# EAGLE board TSAR_Actuator_Controller (EAGLE 9.5.2)
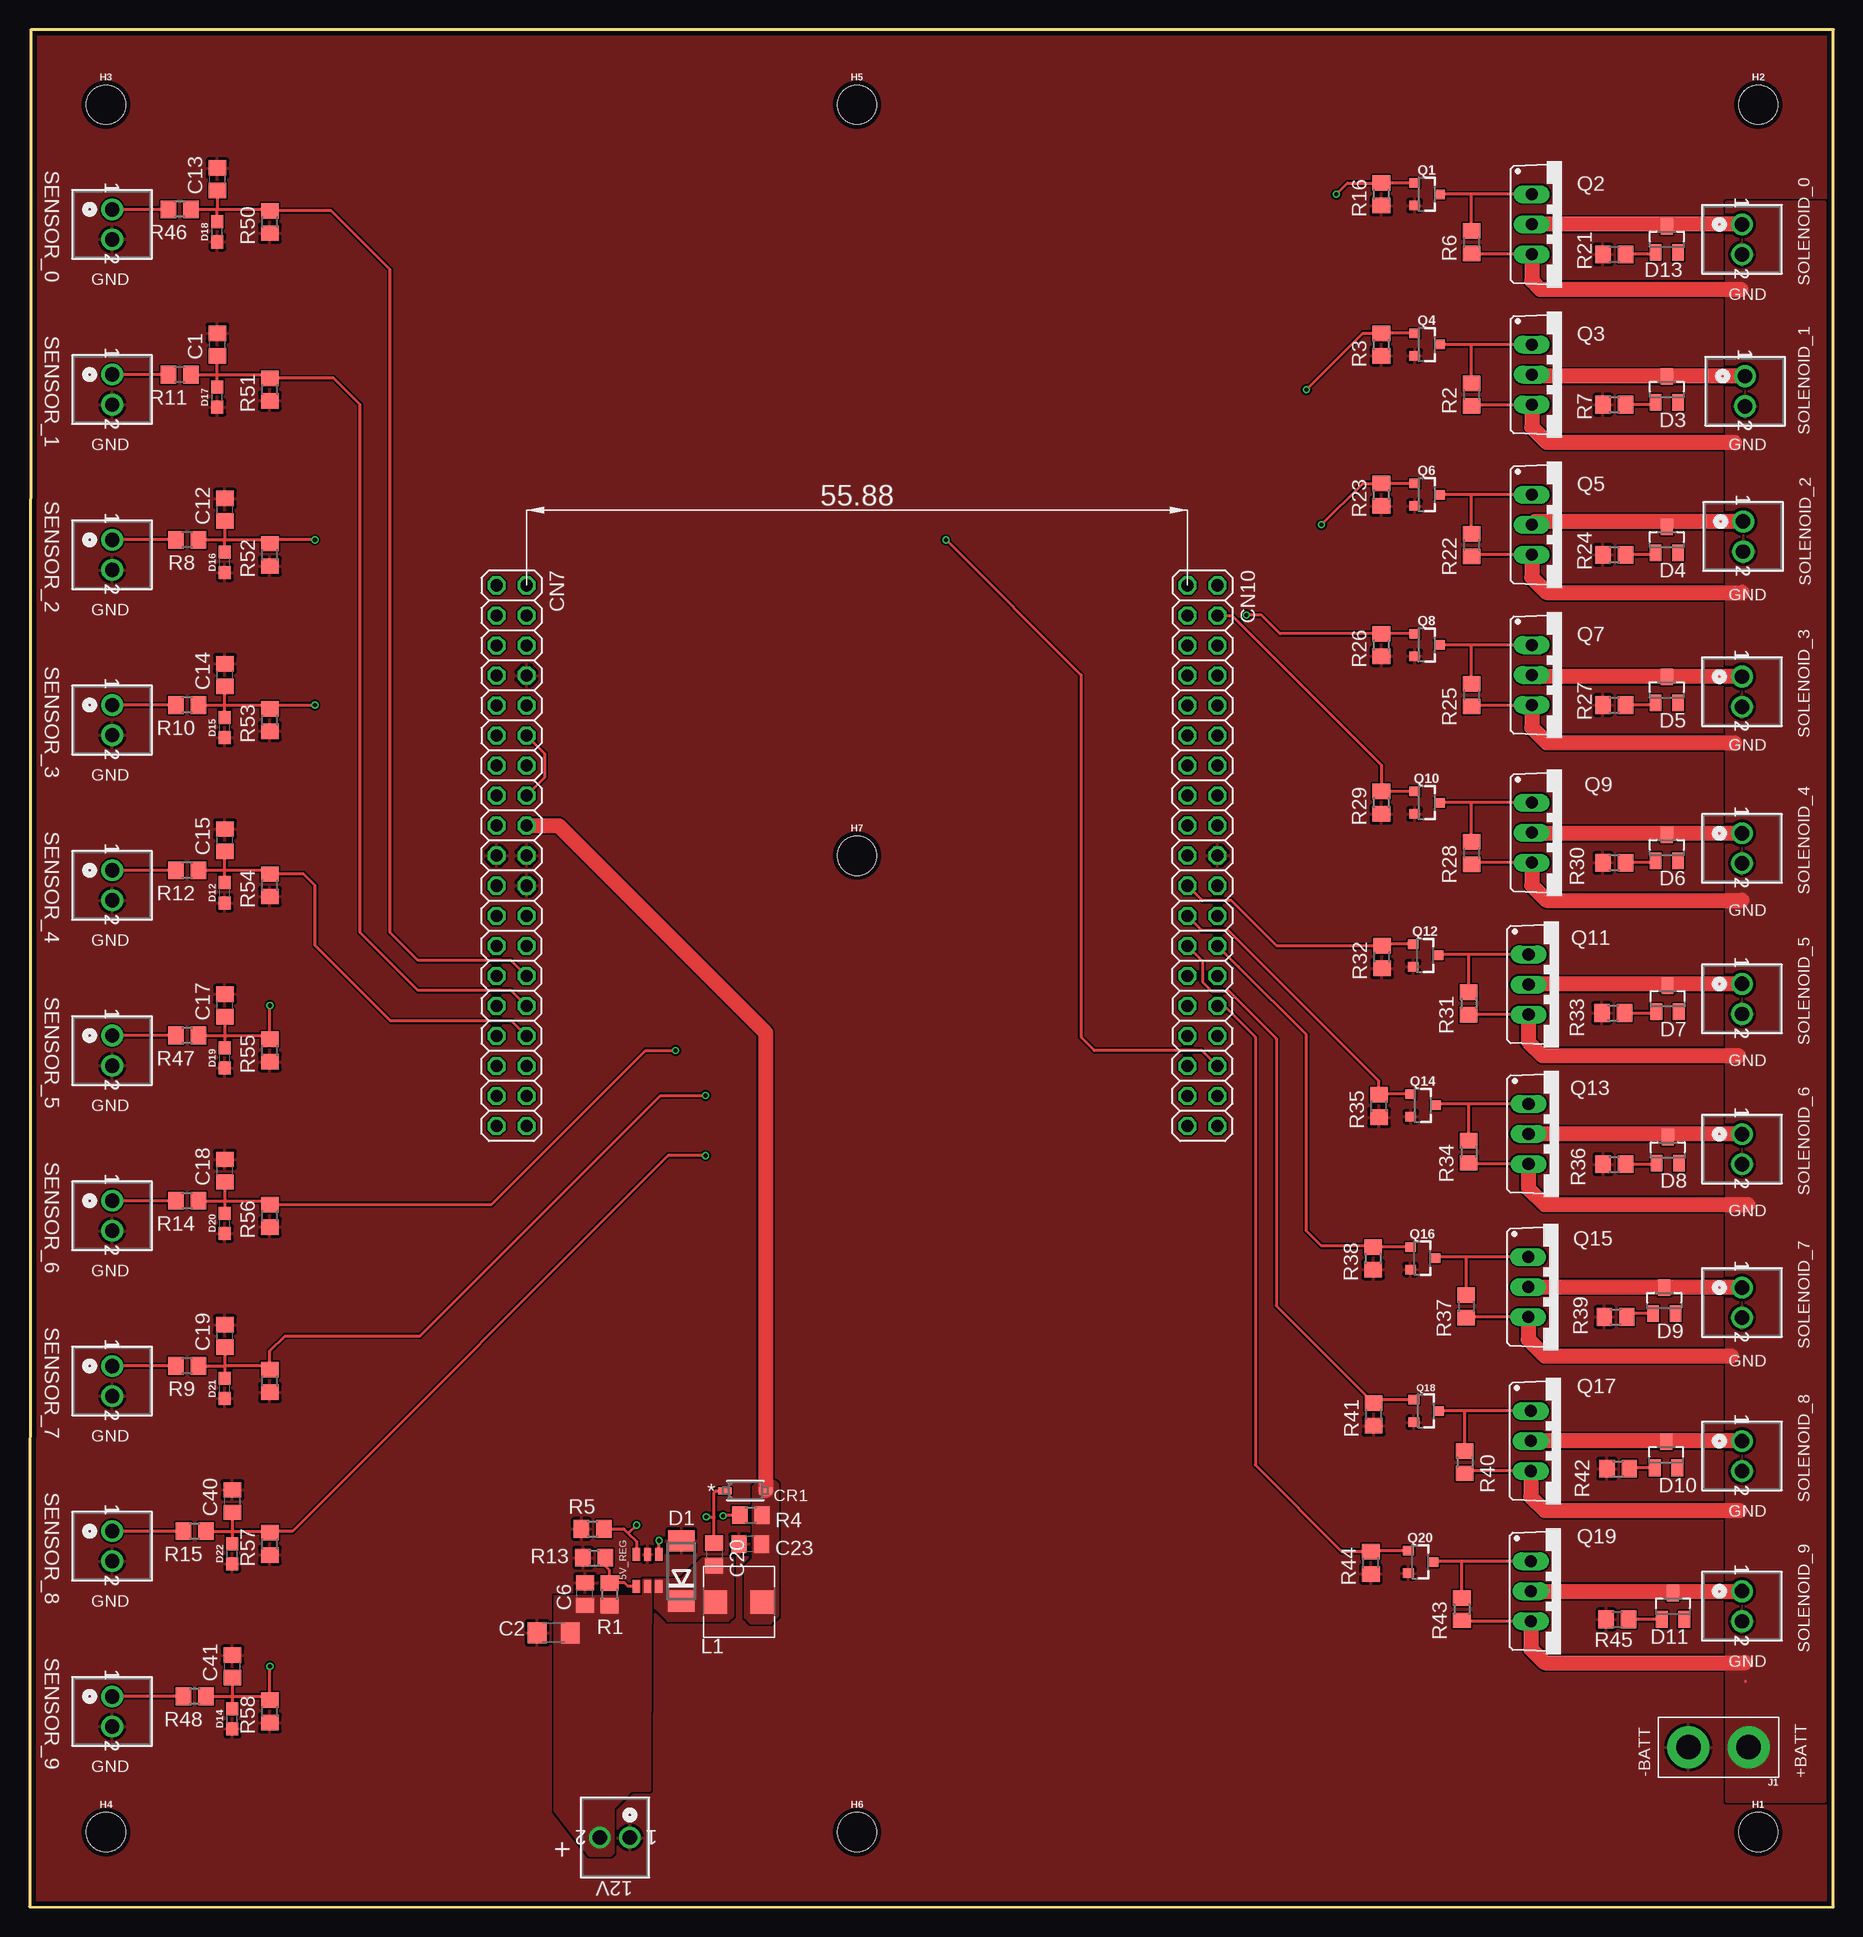
[diagram p0: board, top side]
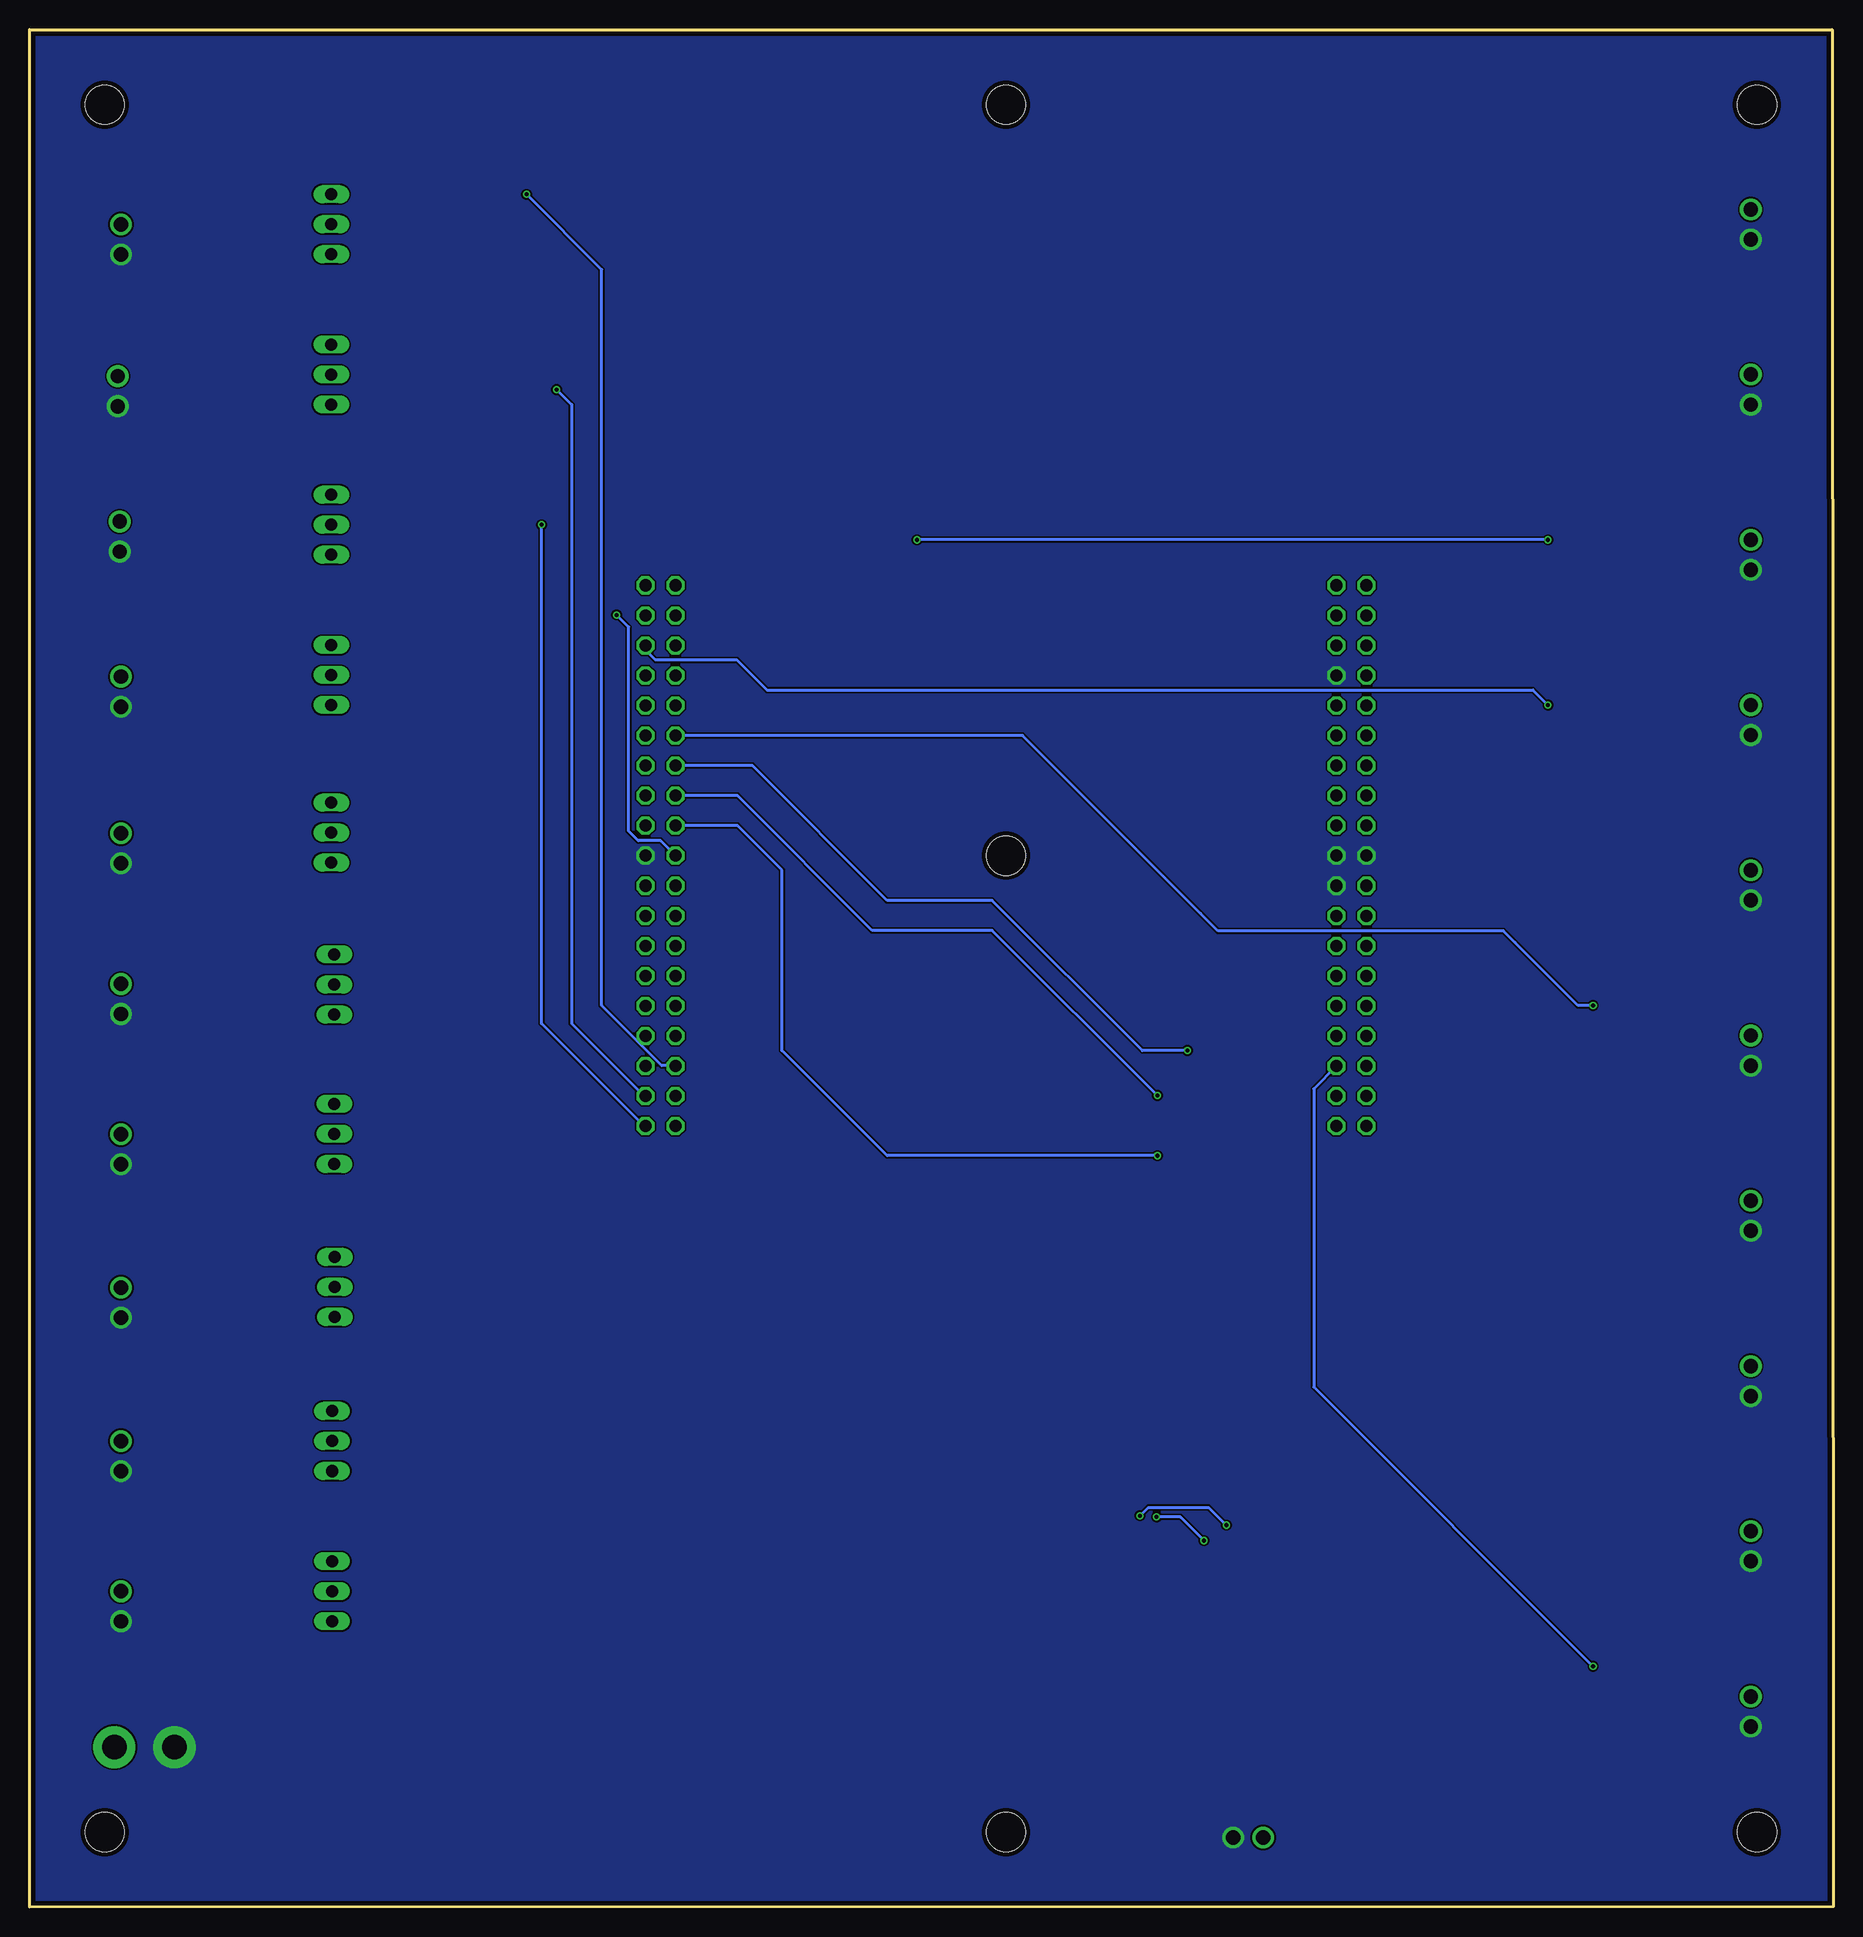
[diagram p1: board, bottom side, seen from below]

Size 152.51 x 158.75 mm. Coordinates in mm from the lower left corner, seen from the top.
Outline: 0,0.04 152.51,0 152.51,158.75 0.11,158.75 0,0.04
Copper layers (1*16): Top 0.035559375mm / dielectric 1.6mm / Bottom 0.035559375mm
Design rules "oshpark-2layer *": minimum track width 6mil, minimum drill 10mil, track to track 6mil, track to pad 6mil, pad to pad 6mil, via to via 6mil, smd to smd 6mil, copper to edge 15mil, drill to drill 6mil, minimum pad ring 5mil, minimum via ring 5mil, stop-mask expansion 2.5mil, vias tented up to drill 10mil, thermal gap 10mil

## Footprints (pad centres in the part's own frame; a part is rotated, then mirrored left to right if it is on the bottom)
SOT6 = smd 1.092 x 0.61: P$1 -1.346,0.95; P$2 -1.346,0; P$3 -1.346,-0.95; P$4 1.346,-0.95; P$5 1.346,0; P$6 1.346,0.95
CONN_282834-2 = drill 1.219 pad 1.727: 1 -2.54,0; 2 0,0
C0805 = smd 1.3 x 1.5: 1 -0.95,0; 2 0.95,0
C1206 = smd 1.6 x 1.8: 1 -1.4,0; 2 1.4,0
2X19 = drill 1.016 octagon: 1 -22.86,-1.27; 2 -22.86,1.27; 3 -20.32,-1.27; 4 -20.32,1.27; 5 -17.78,-1.27; 6 -17.78,1.27; 7 -15.24,-1.27; 8 -15.24,1.27; 9 -12.7,-1.27; 10 -12.7,1.27; 11 -10.16,-1.27; 12 -10.16,1.27; 13 -7.62,-1.27; 14 -7.62,1.27; 15 -5.08,-1.27; 16 -5.08,1.27; 17 -2.54,-1.27; 18 -2.54,1.27; 19 0,-1.27; 20 0,1.27; 21 2.54,-1.27; 22 2.54,1.27; 23 5.08,-1.27; 24 5.08,1.27; 25 7.62,-1.27; 26 7.62,1.27; 27 10.16,-1.27; 28 10.16,1.27; 29 12.7,-1.27; 30 12.7,1.27; 31 15.24,-1.27; 32 15.24,1.27; 33 17.78,-1.27; 34 17.78,1.27; 35 20.32,-1.27; 36 20.32,1.27; 37 22.86,-1.27; 38 22.86,1.27
SOD123 = smd 1.111 x 0.601: 1 -1.725,0; 2 1.725,0
DO214AA = smd 1.8 x 2.2: A 2.55,0; C -2.55,0
SOT23 = smd 1 x 1.4: 1 -0.95,-1.1; 2 0.95,-1.1; 3 0,1.1
0603 = smd 1.1 x 1: 1 -0.85,0; 2 0.85,0
STAND-OFF = hole 3.302: 0,0
1X02_XTRA_BIG = drill 2.057 pad 3.556: 1 -2.54,0; 2 2.54,0
0.209"LX0.197"W(5.30MMX5.00MM) = smd 2 x 2: 1 -2,0; 2 2,0
SOT23-3 = smd 0.8 x 0.9: 1 -0.95,-1; 2 0.95,-1; 3 0,1.1
TO220BV = drill 1.016 long: D 0,-2.54; G -2.54,-2.54; S 2.54,-2.54
R0805 = smd 1.3 x 1.5: 1 -0.95,0; 2 0.95,0

## Placement (x,y rotation side)
5V_REG  MP2456GJ-P  [SOT6]  52.26,28.48 270 top
12V  282834-2  [CONN_282834-2]  48.21,5.89 180 top
C1  120pF  [C0805]  15.88,132.12 90 top
C2  4.7uF  [C1206]  44.32,23.2 180 top
C6  0.1uF  [C0805]  46.96,26.48 90 top
C12  120pF  [C0805]  16.51,118.15 90 top
C13  120pF  [C0805]  15.88,146.09 90 top
C14  120pF  [C0805]  16.51,104.18 90 top
C15  120pF  [C0805]  16.51,90.21 90 top
C17  120pF  [C0805]  16.51,76.24 90 top
C18  120pF  [C0805]  16.51,62.27 90 top
C19  120pF  [C0805]  16.51,48.3 90 top
C20  0.1uF  [C0805]  57.88,29.82 270 top
C23  10uF  [C0805]  60.94,30.7 180 top
C40  120pF  [C0805]  17.14,34.33 90 top
C41  120pF  [C0805]  17.14,20.36 90 top
CN7  [2X19]  40.75,88.9 270 top
CN10  [2X19]  99.17,88.9 270 top
CR1  1N4148W-7-F  [SOD123]  60.51,35.22 0 top
D1  DFLS160  [DO214AA]  55.1,28.43 90 top
D3  BAS40  [SOT23]  138.43,128.31 0 top
D4  BAS40  [SOT23]  138.43,115.61 0 top
D5  BAS40  [SOT23]  138.43,102.91 0 top
D6  BAS40  [SOT23]  138.43,89.58 0 top
D7  BAS40  [SOT23]  138.49,76.8 0 top
D8  BAS40  [SOT23]  138.51,64 0 top
D9  BAS40  [SOT23]  138.21,51.28 0 top
D10  BAS40  [SOT23]  138.37,38.24 0 top
D11  BAS40  [SOT23]  138.95,25.44 0 top
D12  5V  [0603]  16.51,85.77 90 top
D13  BAS40  [SOT23]  138.43,141.01 0 top
D14  5V  [0603]  17.14,15.91 90 top
D15  5V  [0603]  16.51,99.73 90 top
D16  5V  [0603]  16.51,113.7 90 top
D17  5V  [0603]  15.88,127.67 90 top
D18  5V  [0603]  15.88,141.65 90 top
D19  5V  [0603]  16.51,71.8 90 top
D20  5V  [0603]  16.51,57.83 90 top
D21  5V  [0603]  16.51,43.85 90 top
D22  5V  [0603]  17.14,29.89 90 top
H1  STAND-OFF  [STAND-OFF]  146.16,6.35 0 top
H2  STAND-OFF  [STAND-OFF]  146.16,152.4 0 top
H3  STAND-OFF  [STAND-OFF]  6.46,152.4 0 top
H4  STAND-OFF  [STAND-OFF]  6.46,6.35 0 top
H5  STAND-OFF  [STAND-OFF]  69.96,152.4 0 top
H6  STAND-OFF  [STAND-OFF]  69.96,6.35 0 top
H7  STAND-OFF  [STAND-OFF]  69.96,88.9 0 top
J1  [1X02_XTRA_BIG]  142.8,13.53 180 top
L1  10uH  [0.209"LX0.197"W(5.30MMX5.00MM)]  59.97,25.8 0 top
Q1  220mA/50V/3.5Ω  [SOT23-3]  118.11,144.82 270 top
Q2  IRF9530  [TO220BV]  129.54,142.28 270 top
Q3  IRF9530  [TO220BV]  129.54,129.58 270 top
Q4  220mA/50V/3.5Ω  [SOT23-3]  118.11,132.12 270 top
Q5  IRF9530  [TO220BV]  129.54,116.88 270 top
Q6  220mA/50V/3.5Ω  [SOT23-3]  118.11,119.42 270 top
Q7  IRF9530  [TO220BV]  129.54,104.18 270 top
Q8  220mA/50V/3.5Ω  [SOT23-3]  118.11,106.72 270 top
Q9  IRF9530  [TO220BV]  129.54,90.84 270 top
Q10  220mA/50V/3.5Ω  [SOT23-3]  118.11,93.39 270 top
Q11  IRF9530  [TO220BV]  129.28,78.01 270 top
Q12  220mA/50V/3.5Ω  [SOT23-3]  117.98,80.47 270 top
Q13  IRF9530  [TO220BV]  129.28,65.38 270 top
Q14  220mA/50V/3.5Ω  [SOT23-3]  117.78,67.79 270 top
Q15  IRF9530  [TO220BV]  129.25,52.43 270 top
Q16  220mA/50V/3.5Ω  [SOT23-3]  117.75,54.87 270 top
Q17  IRF9530  [TO220BV]  129.47,39.41 270 top
Q18  220mA/50V/3.5Ω  [SOT23-3]  118.04,41.95 270 top
Q19  IRF9530  [TO220BV]  129.47,26.71 270 top
Q20  220mA/50V/3.5Ω  [SOT23-3]  117.57,29.19 270 top
R1  10K  [R0805]  49.03,26.45 270 top
R2  4.7K  [R0805]  121.92,127.88 270 top
R3  10k  [R0805]  114.3,132.12 90 top
R4  124k  [R0805]  60.98,33.15 0 top
R5  23.7k  [R0805]  47.6,31.99 0 top
R6  4.7K  [R0805]  121.92,140.78 270 top
R7  28k  [R0805]  133.99,127.04 0 top
R8  1k  [R0805]  13.33,115.61 180 top
R9  1k  [R0805]  13.33,45.76 180 top
R10  1k  [R0805]  13.33,101.64 180 top
R11  1k  [R0805]  12.7,129.58 180 top
R12  1k  [R0805]  13.33,87.67 180 top
R13  NP  [R0805]  47.74,29.55 0 top
R14  1k  [R0805]  13.33,59.73 180 top
R15  1k  [R0805]  13.97,31.79 180 top
R16  10k  [R0805]  114.3,144.82 90 top
R21  28k  [R0805]  133.99,139.74 0 top
R22  4.7K  [R0805]  121.92,115.17 270 top
R23  10k  [R0805]  114.3,119.42 90 top
R24  28k  [R0805]  133.99,114.34 0 top
R25  4.7K  [R0805]  121.92,102.47 270 top
R26  10k  [R0805]  114.3,106.72 90 top
R27  28k  [R0805]  133.99,101.64 0 top
R28  4.7K  [R0805]  121.92,89.14 270 top
R29  10k  [R0805]  114.3,93.39 90 top
R30  28k  [R0805]  133.99,88.31 0 top
R31  4.7K  [R0805]  121.67,76.42 270 top
R32  10k  [R0805]  114.35,80.33 90 top
R33  28k  [R0805]  133.89,75.61 0 top
R34  4.7K  [R0805]  121.67,63.87 270 top
R35  10k  [R0805]  114.1,67.73 90 top
R36  28k  [R0805]  133.99,62.81 0 top
R37  4.7K  [R0805]  121.46,50.79 270 top
R38  10k  [R0805]  113.6,54.86 90 top
R39  28k  [R0805]  134.09,49.91 0 top
R40  4.7K  [R0805]  121.33,37.62 270 top
R41  10k  [R0805]  113.64,41.65 90 top
R42  28k  [R0805]  134.31,37.08 0 top
R43  4.7K  [R0805]  121.09,25.2 270 top
R44  10k  [R0805]  113.4,29.13 90 top
R45  28k  [R0805]  134.25,24.34 0 top
R46  1k  [R0805]  12.7,143.55 180 top
R47  1k  [R0805]  13.33,73.7 180 top
R48  1k  [R0805]  13.97,17.82 180 top
R49  NP  [R0805]  20.32,44.49 90 top
R50  NP  [R0805]  20.32,142.48 90 top
R51  NP  [R0805]  20.32,128.31 90 top
R52  NP  [R0805]  20.32,114.34 90 top
R53  NP  [R0805]  20.32,100.37 90 top
R54  NP  [R0805]  20.32,86.4 90 top
R55  NP  [R0805]  20.32,72.43 90 top
R56  NP  [R0805]  20.32,58.46 90 top
R57  NP  [R0805]  20.32,30.72 90 top
R58  NP  [R0805]  20.32,16.55 90 top
SENSOR_0  282834-2  [CONN_282834-2]  6.99,141.01 270 top
SENSOR_1  282834-2  [CONN_282834-2]  6.99,127.04 270 top
SENSOR_2  282834-2  [CONN_282834-2]  6.99,113.07 270 top
SENSOR_3  282834-2  [CONN_282834-2]  6.99,99.1 270 top
SENSOR_4  282834-2  [CONN_282834-2]  6.99,85.13 270 top
SENSOR_5  282834-2  [CONN_282834-2]  6.99,71.16 270 top
SENSOR_6  282834-2  [CONN_282834-2]  6.99,57.19 270 top
SENSOR_7  282834-2  [CONN_282834-2]  6.99,43.22 270 top
SENSOR_8  282834-2  [CONN_282834-2]  6.99,29.25 270 top
SENSOR_9  282834-2  [CONN_282834-2]  6.99,15.28 270 top
SOLENOID_0  282834-2  [CONN_282834-2]  144.78,139.74 270 top
SOLENOID_1  282834-2  [CONN_282834-2]  145.06,126.91 270 top
SOLENOID_2  282834-2  [CONN_282834-2]  144.89,114.61 270 top
SOLENOID_3  282834-2  [CONN_282834-2]  144.78,101.5 270 top
SOLENOID_4  282834-2  [CONN_282834-2]  144.78,88.25 270 top
SOLENOID_5  282834-2  [CONN_282834-2]  144.78,75.52 270 top
SOLENOID_6  282834-2  [CONN_282834-2]  144.78,62.82 270 top
SOLENOID_7  282834-2  [CONN_282834-2]  144.78,49.84 270 top
SOLENOID_8  282834-2  [CONN_282834-2]  144.78,36.87 270 top
SOLENOID_9  282834-2  [CONN_282834-2]  144.78,24.17 270 top

## Library data of the parts
5V_REG L1 = TSAR_Controller
12V SENSOR_0 SENSOR_1-SENSOR_9 SOLENOID_0 SOLENOID_1-SOLENOID_9 = TSAR_Controller; BUILT_BY: EMA_UL_Team; COPYRIGHT: Copyright (C) 2016 Accelerated Designs. All rights reserved; MANUFACTURER_PART_NUMBER: 282834-2; VENDOR: TE Connectivity
C1 C2 C6 C12-C15 C17-C20 C23 C40 C41 = rcl; SPICEPREFIX: C
CN7 CN10 = pinhead
CR1 = TSAR_Controller; BUILT_BY: EMA_Anthony; COPYRIGHT: Copyright (C) 2016 Accelerated Designs. All rights reserved; MANUFACTURER_PART_NUMBER: 1N4148W-7-F; VENDOR: Diodes Inc
D1 D3-D11 D13 = diode
D12 D14-D22 = SparkFun-DiscreteSemi; PROD_ID: DIO-14502
H1-H7 = SparkFun-Hardware
J1 = SparkFun-Connectors
Q1 Q4 Q6 Q8 Q10 Q12 Q14 Q16 Q18 Q20 = SparkFun-DiscreteSemi; PROD_ID: TRANS-00830
Q2 Q3 Q5 Q7 Q9 Q11 Q13 Q15 Q17 Q19 = transistor-power
R1-R16 R21-R58 = rcl; SPICEPREFIX: R

## Nets
5V_USB_CHG: CN10.8
+5V: C23.1 CN7.18 CR1.2 L1.2 R4.2
+12V: 5V_REG.P$5 12V.2 C2.1 C6.1 R1.2
AGND: CN10.9
AVDD: CN10.7
E5V: CN7.6
EVAL-3V3: CN7.12 CN7.16
EVAL-VIN: CN7.24
GND: 5V_REG.P$2 12V.1 C1.2 C2.2 C6.2 C12.2 C13.2 C14.2 C15.2 C17.2 C18.2 C19.2 C23.2 C40.2 C41.2 CN7.8 CN7.19 CN7.20 CN7.22 CN10.20 D1.A D12.1 D14.1 D15.1 D16.1 D17.1 D18.1 D19.1 D20.1 D21.1 D22.1 J1.2 Q1.2 Q4.2 Q6.2 Q8.2 Q10.2 Q12.2 Q14.2 Q16.2 Q18.2 Q20.2 R3.1 R5.1 R7.1 R13.1 R16.1 R21.1 R23.1 R24.1 R26.1 R27.1 R29.1 R30.1 R32.1 R33.1 R35.1 R36.1 R38.1 R39.1 R41.1 R42.1 R44.1 R45.1 R49.1 R50.1 R51.1 R52.1 R53.1 R54.1 R55.1 R56.1 R57.1 R58.1 SENSOR_0.2 SENSOR_1.2 SENSOR_2.2 SENSOR_3.2 SENSOR_4.2 SENSOR_5.2 SENSOR_6.2 SENSOR_7.2 SENSOR_8.2 SENSOR_9.2 SOLENOID_0.2 SOLENOID_1.2 SOLENOID_2.2 SOLENOID_3.2 SOLENOID_4.2 SOLENOID_5.2 SOLENOID_6.2 SOLENOID_7.2 SOLENOID_8.2 SOLENOID_9.2
N$1: Q1.3 Q2.G R6.1
N$3: 5V_REG.P$4 R1.1 R13.2
N$4: 5V_REG.P$1 C20.1 CR1.1
N$8: 5V_REG.P$6 C20.2 D1.C L1.1
N$9: R46.2 SENSOR_0.1
N$10: R11.2 SENSOR_1.1
N$11: R8.2 SENSOR_2.1
N$12: R10.2 SENSOR_3.1
N$13: R12.2 SENSOR_4.1
N$14: R47.2 SENSOR_5.1
N$15: R14.2 SENSOR_6.1
N$16: R9.2 SENSOR_7.1
N$18: R15.2 SENSOR_8.1
N$19: 5V_REG.P$3 R4.1 R5.2
N$20: R48.2 SENSOR_9.1
N$29: D3.1 R7.2
N$30: Q3.G Q4.3 R2.1
N$31: D4.1 R24.2
N$32: Q5.G Q6.3 R22.1
N$33: D5.1 R27.2
N$34: Q7.G Q8.3 R25.1
N$36: D6.1 R30.2
N$37: Q9.G Q10.3 R28.1
N$38: D7.1 R33.2
N$39: Q11.G Q12.3 R31.1
N$40: D8.1 R36.2
N$41: Q13.G Q14.3 R34.1
N$42: D9.1 R39.2
N$43: Q15.G Q16.3 R37.1
N$44: D10.1 R42.2
N$45: Q17.G Q18.3 R40.1
N$46: D11.1 R45.2
N$47: Q19.G Q20.3 R43.1
N$54: D13.1 R21.2
NRST: CN7.14
PA11: CN10.14
PA12: CN10.12
PA14: CN7.7
PB2: CN10.22
PB3: CN10.31
PB4: CN10.27
PB5: CN10.29
PB6: CN10.24
PB7: CN7.21
PB8: CN10.3
PB9: CN10.5
PB10: CN10.28
PB11: CN7.36
PB12: CN7.38
PC0: CN10.18
PC1: CN10.16
PC2: CN7.35
PC3: CN7.37
PC4: CN10.35
PC5: CN10.37
PC8: CN10.2
PC9: CN10.1
PC10: CN7.1
PC11: CN7.2
PC12: CN7.3
PC13: CN7.23
PC14: CN7.25
PC15: CN7.27
PD0: CN7.9
PD1: CN7.10
PD2: CN7.4
PD3: CN7.11
PD4: CN7.15
PD5: CN7.26
PD6: CN10.10
PD13: CN7.13
PD15: CN7.17
PF0: CN7.29
PF1: CN7.31
SOL_GPIO_0: CN10.33 Q1.1 R16.2
SOL_GPIO_1: CN10.36 Q4.1 R3.2
SOL_GPIO_2: CN10.38 Q6.1 R23.2
SOL_GPIO_3: CN10.19 Q8.1 R26.2
SOL_GPIO_4: CN10.4 Q10.1 R29.2
SOL_GPIO_5: CN10.21 Q12.1 R32.2
SOL_GPIO_6: CN10.23 Q14.1 R35.2
SOL_GPIO_7: CN10.26 Q16.1 R38.2
SOL_GPIO_8: CN10.25 Q18.1 R41.2
SOL_GPIO_9: CN10.30 Q20.1 R44.2
SOL_GPIO_10: D13.3 Q2.D SOLENOID_0.1
SOL_GPIO_11: D3.3 Q3.D SOLENOID_1.1
SOL_GPIO_12: D4.3 Q5.D SOLENOID_2.1
SOL_GPIO_13: D5.3 Q7.D SOLENOID_3.1
SOL_GPIO_14: D6.3 Q9.D SOLENOID_4.1
SOL_GPIO_15: D7.3 Q11.D SOLENOID_5.1
SOL_GPIO_16: D8.3 Q13.D SOLENOID_6.1
SOL_GPIO_17: D9.3 Q15.D SOLENOID_7.1
SOL_GPIO_18: D10.3 Q17.D SOLENOID_8.1
SOL_GPIO_19: D11.3 Q19.D SOLENOID_9.1
TBD_SENSOR_0: C13.1 CN7.28 D18.2 R46.1 R50.2
TBD_SENSOR_1: C1.1 CN7.30 D17.2 R11.1 R51.2
TBD_SENSOR_2: C12.1 CN10.34 D16.2 R8.1 R52.2
TBD_SENSOR_3: C14.1 CN10.6 D15.2 R10.1 R53.2
TBD_SENSOR_4: C15.1 CN7.32 D12.2 R12.1 R54.2
TBD_SENSOR_5: C17.1 CN10.11 D19.2 R47.1 R55.2
TBD_SENSOR_6: C18.1 CN10.13 D20.2 R14.1 R56.2
TBD_SENSOR_7: C19.1 CN10.15 D21.2 R9.1 R49.2
TBD_SENSOR_8: C40.1 CN10.17 D22.2 R15.1 R57.2
TBD_SENSOR_9: C41.1 CN7.34 D14.2 R48.1 R58.2
VBAT: CN7.33
VBATT: J1.1 Q2.S Q3.S Q5.S Q7.S Q9.S Q11.S Q13.S Q15.S Q17.S Q19.S R2.2 R6.2 R22.2 R25.2 R28.2 R31.2 R34.2 R37.2 R40.2 R43.2
VDD: CN7.5

## Tracks (layer width: path | path; a pad name or v marks a point on that pad's centre or on a via)
+5V
  Top 1.27: CN7.18 44.74,91.44 62.23,73.95 CR1.2
  pour Top (no thermals): 61.02,24 60.52,24.5 60.52,28.8 61.22,29.5 61.22,35.6 61.62,36 63.02,36 63.22,35.8 63.22,24.6 62.62,24
+12V
  pour Top (no thermals): 52.42,12.8 52.42,9.85 50.87,9.85 49.32,8.3 49.32,4.55 49.12,4.35 47.37,4.35 44.42,8.13 44.42,26.3 51.92,26.3 51.92,27.7 52.5,27.7 52.43,12.81
EVAL-3V3
  Top 0.254: CN7.12 43.54,97.54 43.54,95.5 CN7.16 42.02,93.82
GND
  pour Bottom (rank 3, no thermals): 0.11,158.75 152.51,158.75 152.51,0.04 0.11,0.04
  pour Top (rank 3): 0.11,158.75 152.51,158.75 152.51,0.04 0.11,0.04
N$1
  Top 0.254: Q2.G 121.92,144.82 | 121.92,144.82 Q1.3 | R6.1 121.92,144.82
N$3
  Top 0.254: 5V_REG.P$4 50.59,27.13 50.31,27.41 R1.1 49.02,27.42 49.02,28.5 48.69,28.83 R13.2
N$4  (via drill 0.35)
  Top 0.254: C20.1 57.88,33 | 57.88,33 57.88,35.06 58.03,35.22 CR1.1 | 5V_REG.P$1 53.2,30.98 v53.22,31 | v57.22,33 57.88,33
  Bottom 0.254: v53.22,31 55.22,33 v57.22,33
N$8
  Top 0.254: L1.1 57.89,25.73
  pour Top (no thermals): 52.92,27.7 55.22,27.7 55.22,27.8 56.92,29.5 59.42,29.5 59.42,24.6 59.02,24.2 54.02,24.2 52.92,25.3
N$9
  Top 0.254: SENSOR_0.1 R46.2
N$10
  Top 0.254: R11.2 SENSOR_1.1
N$11
  Top 0.254: R8.2 SENSOR_2.1
N$12
  Top 0.254: R10.2 SENSOR_3.1
N$13
  Top 0.254: SENSOR_4.1 R12.2
N$14
  Top 0.254: R47.2 SENSOR_5.1
N$15
  Top 0.254: R14.2 SENSOR_6.1
N$16
  Top 0.254: R9.2 SENSOR_7.1
N$18
  Top 0.254: R15.2 SENSOR_8.1
N$19  (via drill 0.35)
  Top 0.254: R5.2 50.23,31.99 50.62,31.6 | 5V_REG.P$3 51.3,30.91 50.62,31.6 | R4.1 58.67,33.15 v58.62,33.1 | v51.32,32.3 50.62,31.6
  Bottom 0.254: v58.62,33.1 57.92,33.8 52.82,33.8 v51.32,32.3
N$20
  Top 0.254: R48.2 SENSOR_9.1
N$29
  Top 0.254: D3.1 137.31,127.04 R7.2
N$30
  Top 0.254: Q3.G 121.92,132.12 | 121.92,132.12 Q4.3 | R2.1 121.92,132.12
N$31
  Top 0.254: D4.1 137.31,114.34 R24.2
N$32
  Top 0.254: Q5.G 121.92,119.42 | 121.92,119.42 Q6.3 | R22.1 121.92,119.42
N$33
  Top 0.254: D5.1 137.31,101.64 R27.2
N$34
  Top 0.254: Q7.G 121.92,106.72 | 121.92,106.72 Q8.3 | R25.1 121.92,106.72
N$36
  Top 0.254: D6.1 137.31,88.31 R30.2
N$37
  Top 0.254: Q9.G 121.92,93.39 | 121.92,93.39 Q10.3 | R28.1 121.92,93.39
N$38
  Top 0.254: R33.2 137.45,75.61 D7.1
N$39
  Top 0.254: Q11.G 121.71,80.55 | 121.71,80.55 119.16,80.55 Q12.3 | R31.1 121.67,80.51 121.71,80.55
N$40
  Top 0.254: D8.1 137.47,62.81 R36.2
N$41
  Top 0.254: Q13.G 121.71,67.92 | 121.71,67.92 119.01,67.92 Q14.3 | R34.1 121.67,67.88 121.71,67.92
N$42
  Top 0.254: D9.1 135.32,50.18 R39.2
N$43
  Top 0.254: Q15.G 121.46,54.97 | Q16.3 118.85,55.02 118.95,55.12 119.1,54.97 121.46,54.97 | R37.1 121.46,54.97
N$44
  Top 0.254: R42.2 135.33,37.15 D10.1
N$45
  Top 0.254: Q17.G 121.41,41.95 | 121.41,41.95 Q18.3 | R40.1 121.33,41.88 121.41,41.95
N$46
  Top 0.254: D11.1 135.04,24.34 R45.2
N$47
  Top 0.254: Q19.G 121.09,29.25 | 121.09,29.25 118.73,29.25 Q20.3 | R43.1 121.09,29.25
N$54
  Top 0.254: D13.1 137.31,139.74 R21.2
SOL_GPIO_0  (via drill 0.35)
  Top 0.254: Q1.1 R16.2 111.44,145.77 v110.49,144.82
  Bottom 0.254: v110.49,144.82 104.14,138.47 104.14,76.24 99.06,71.16 97.94,71.16 CN10.33
SOL_GPIO_1  (via drill 0.35)
  Top 0.254: Q4.1 R3.2 112.71,133.07 v107.95,128.31
  Bottom 0.254: 102.14,70.18 106.68,74.72 106.68,127.04 v107.95,128.31 | 102.14,70.18 102.11,70.14 | 102.14,70.18 100.54,68.58 CN10.36
SOL_GPIO_2  (via drill 0.35)
  Top 0.254: Q6.1 R23.2 112.71,120.37 v109.22,116.88
  Bottom 0.254: 101.85,67.35 101.89,67.39 | 101.89,67.39 109.22,74.72 v109.22,116.88 | 101.89,67.39 100.54,66.04 CN10.38
SOL_GPIO_3  (via drill 0.35)
  Top 0.254: Q8.1 R26.2 105.73,107.67 104.14,109.26 v102.87,109.26
  Bottom 0.254: v102.87,109.26 101.85,108.24 101.85,90.97 101.05,90.17 99.17,90.17 CN10.19
SOL_GPIO_4
  Top 0.254: Q10.1 R29.2 114.3,96.56 101.64,109.22 CN10.4
SOL_GPIO_5
  Top 0.254: Q12.1 114.49,81.42 R32.2 105.45,81.28 101.6,85.13 99.15,85.13 99.15,85.11 CN10.21
SOL_GPIO_6
  Top 0.254: Q14.1 114.16,68.74 R35.2 114.1,69.84 101.35,82.59 99.13,82.59 CN10.23
SOL_GPIO_7
  Top 0.254: Q16.1 R38.2 113.49,55.92 109.22,55.92 107.95,57.19 107.95,73.77 102.22,79.5 CN10.26
SOL_GPIO_8
  Top 0.254: Q18.1 113.16,42.9 R41.2 105.41,50.84 105.41,73.45 101.35,77.51 101.31,77.47 99.93,77.47 99.17,78.23 99.17,80.01 CN10.25
SOL_GPIO_9
  Top 0.254: Q20.1 113.86,30.14 R44.2 110.93,30.08 103.63,37.38 103.63,73.59 101.02,76.2 CN10.30
SOL_GPIO_10
  Top 0.254: D13.3 138.6,142.28 SOLENOID_0.1
  Top 1.27: SOLENOID_0.1 Q2.D
SOL_GPIO_11
  Top 0.254: 127.13,129.45 Q3.D | D3.3 138.47,129.45 SOLENOID_1.1
  Top 1.27: SOLENOID_1.1 127.13,129.45
SOL_GPIO_12
  Top 0.254: 127.27,117.15 Q5.D | D4.3 138.87,117.15 SOLENOID_2.1
  Top 1.27: SOLENOID_2.1 127.27,117.15
SOL_GPIO_13
  Top 0.254: 127.14,104.05 Q7.D | D5.3 138.47,104.05 SOLENOID_3.1
  Top 1.27: SOLENOID_3.1 127.14,104.05
SOL_GPIO_14
  Top 0.254: 127.05,90.8 Q9.D | D6.3 138.55,90.8 SOLENOID_4.1
  Top 1.27: SOLENOID_4.1 127.05,90.8
SOL_GPIO_15
  Top 0.254: 126.79,78.06 Q11.D | D7.3 138.65,78.06 SOLENOID_5.1
  Top 1.27: SOLENOID_5.1 126.79,78.06
SOL_GPIO_16
  Top 0.254: 126.76,65.36 Q13.D | D8.3 138.77,65.36 SOLENOID_6.1
  Top 1.27: SOLENOID_6.1 126.76,65.36
SOL_GPIO_17
  Top 0.254: SOLENOID_7.1 144.74,52.43 138.26,52.43 D9.3
  Top 1.27: Q15.D 144.74,52.43
SOL_GPIO_18
  Top 0.254: D10.3 138.44,39.41 SOLENOID_8.1
  Top 1.27: SOLENOID_8.1 Q17.D
SOL_GPIO_19
  Top 0.254: D11.3 139.12,26.71 SOLENOID_9.1
  Top 1.27: Q19.D SOLENOID_9.1
TBD_SENSOR_0
  Top 0.254: R46.1 15.88,143.55 | D18.2 15.88,143.55 | C13.1 15.88,143.55 | CN7.28 40.71,80.05 32.85,80.05 30.48,82.42 30.48,138.47 25.52,143.43 R50.2 20.2,143.55 15.88,143.55
TBD_SENSOR_1
  Top 0.254: R11.1 15.88,129.58 | 15.88,129.58 C1.1 | D17.2 15.88,129.58 | 15.88,129.58 20,129.58 R51.2 25.72,129.26 27.94,127.04 27.94,82.42 32.85,77.51 40.71,77.51 CN7.30
TBD_SENSOR_2  (via drill 0.35)
  Top 0.254: R8.1 16.51,115.61 | C12.1 16.51,115.61 | D16.2 16.51,115.61 | v77.47,115.61 88.9,104.18 88.9,73.56 90.03,72.43 99.13,72.43 CN10.34 | 20.57,115.54 20.64,115.61 v24.13,115.61 | 20.57,115.54 R52.2 | 16.51,115.61 20.5,115.61 20.57,115.54
  Bottom 0.254: v24.13,115.61 v77.47,115.61
TBD_SENSOR_3  (via drill 0.35)
  Top 0.254: R10.1 16.51,101.64 | 16.51,101.64 C14.1 | D15.2 16.51,101.64 | 16.51,101.64 20,101.64 R53.2 20.64,101.64 v24.13,101.64
  Bottom 0.254: CN10.6 100.44,106.3 99.59,105.45 92.71,105.45 90.17,102.91 25.4,102.91 v24.13,101.64
TBD_SENSOR_4
  Top 0.254: R12.1 16.51,87.67 | 16.51,87.67 C15.1 | D12.2 16.51,87.67 | 16.51,87.67 20,87.67 R54.2 23.18,87.35 24.13,86.4 24.13,81.32 30.43,75.02 30.52,74.93 40.75,74.93 CN7.32
TBD_SENSOR_5  (via drill 0.35)
  Top 0.254: C17.1 16.51,73.7 | 16.51,73.7 D19.2 | R47.1 16.51,73.7 | 16.51,73.7 20,73.7 R55.2 v20.32,76.24
  Bottom 0.254: v20.32,76.24 21.59,76.24 26.92,81.57 27.9,82.55 52.03,82.55 53.5,84.02 68.54,99.06 CN10.11
TBD_SENSOR_6  (via drill 0.35)
  Top 0.254: C18.1 16.51,59.73 | 16.51,59.73 D20.2 | R14.1 16.51,59.73 | 16.51,59.73 20,59.73 R56.2 39.05,59.41 52.07,72.43 v54.61,72.43
  Bottom 0.254: CN10.13 91.4,96.52 80.01,85.13 71.12,85.13 58.42,72.43 v54.61,72.43
TBD_SENSOR_7  (via drill 0.35)
  Top 0.254: C19.1 16.51,45.76 | 16.51,45.76 D21.2 | R9.1 16.51,45.76 | 16.51,45.76 20.12,45.76 20.12,45.64 R49.2 20.32,47.03 21.59,48.3 33.02,48.3 53.34,68.62 v57.15,68.62
  Bottom 0.254: v57.15,68.62 71.12,82.59 81.28,82.59 92.67,93.98 CN10.15
TBD_SENSOR_8  (via drill 0.35)
  Top 0.254: C40.1 17.14,31.79 | 17.14,31.79 D22.2 | R15.1 17.14,31.79 | v57.15,63.54 53.99,63.54 22.24,31.79 20.2,31.79 | 17.14,31.79 20.2,31.79 | 20.2,31.79 R57.2
  Bottom 0.254: v57.15,63.54 80.01,63.54 88.9,72.43 88.9,87.67 92.67,91.44 CN10.17
TBD_SENSOR_9  (via drill 0.35)
  Top 0.254: C41.1 17.14,17.82 | 17.14,17.82 D14.2 | R48.1 17.14,17.82 | 17.14,17.82 20,17.82 R58.2 v20.32,20.36
  Bottom 0.254: v20.32,20.36 43.94,43.98 43.94,69.2 CN7.34
VBATT
  Top 0.254: Q19.S 121.17,24.17 R43.2 | Q17.S 121.53,36.87 R40.2 | 145.1,19.09 145.1,19.12 | Q15.S 121.51,49.89 R37.2 | R34.2 121.75,62.84 Q13.S | Q11.S R31.2 | Q9.S 122.03,88.31 R28.2 | Q7.S 121.92,101.64 R25.2 | R2.2 122.03,127.04 Q3.S | Q5.S 122.03,114.34 R22.2 | Q2.S 122,139.74 R6.2
  Top 1.27: Q17.S 126.93,34.71 128.1,33.54 144.58,33.54 | Q19.S 126.93,21.84 128.1,20.66 145.1,20.66 | Q15.S 126.71,48 128.11,46.6 143.91,46.6 | Q13.S 126.74,60.77 128.11,59.4 145.31,59.4 | Q11.S 126.74,73.17 127.91,72 144.51,72 | Q9.S 127,86.4 128.27,85.13 144.78,85.13 | 144.15,98.47 128.27,98.47 127,99.73 Q7.S | 144.78,111.17 128.27,111.17 127,112.44 Q5.S | 144.15,123.86 128.27,123.86 127,125.14 Q3.S | Q2.S 127,137.51 127.71,136.8 144.71,136.8
  pour Top (isolate 0.254, no thermals): 151.77,8.93 143.51,8.93 143.51,144.19 151.77,144.19

## Text on the board
tNames: GND | GND | GND | GND | GND | GND | GND | GND | GND | GND | GND | GND | GND | GND | GND | GND | GND | GND | GND | -BATT | GND | +BATT | +
tDocu: Top / This Side Towards Space